# EAGLE board BigLatchingRelayOnAStick (EAGLE 7.4.0)
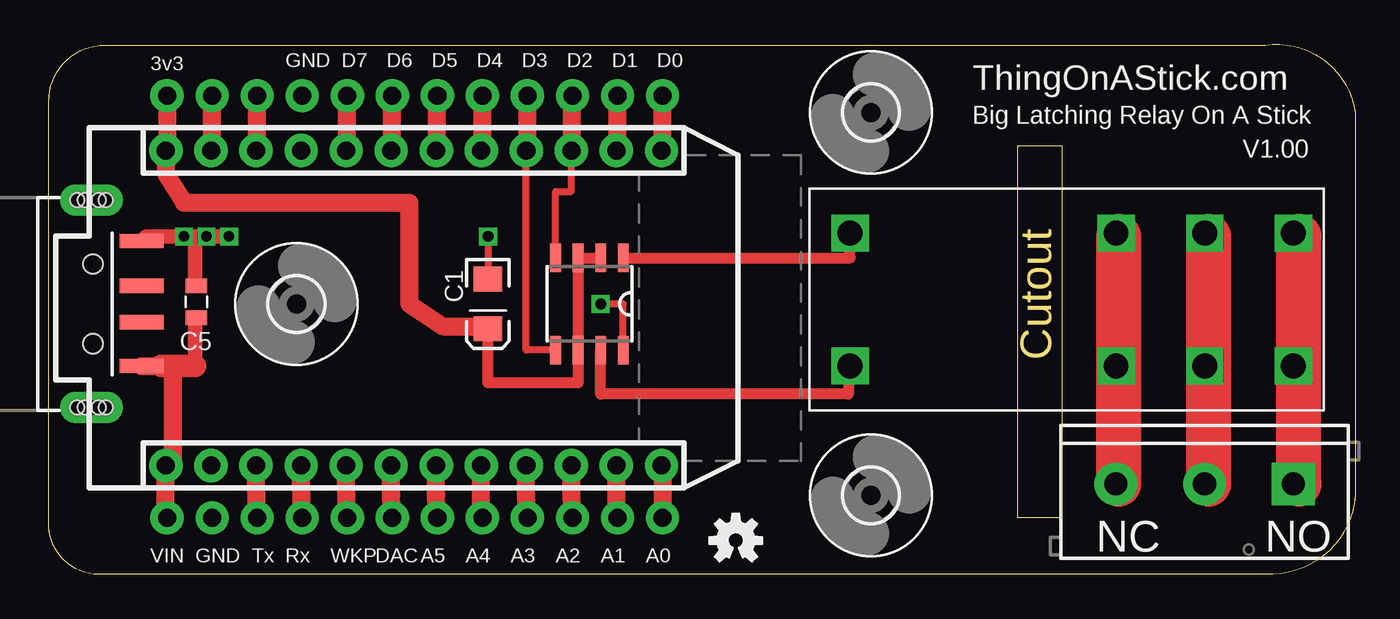
[diagram p0: board, top side]
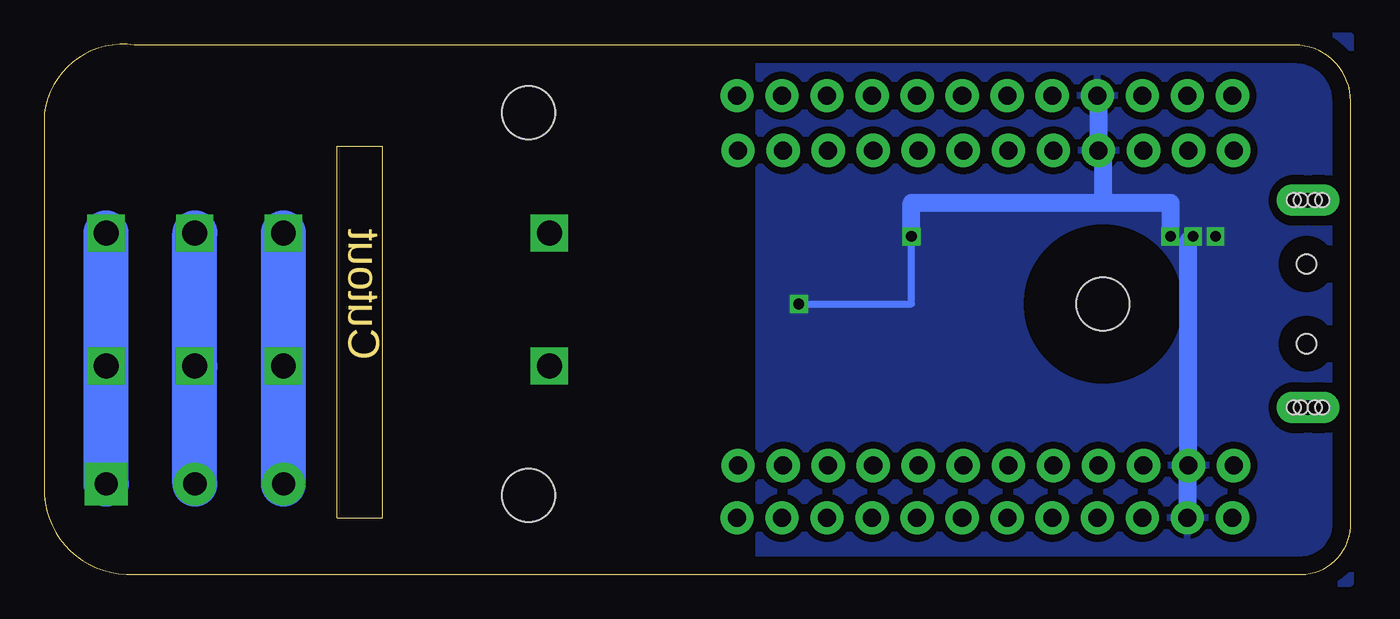
[diagram p1: board, bottom side, seen from below]

Size 73.68 x 29.89 mm. Coordinates in mm from the lower left corner, seen from the top.
Outline: 3.19,29.85 68.6,29.85 arc-90 73.68,26.04 73.68,4.45 arc-90 68.6,0.01 2.56,0.01 arc-90 0.02,3.18 0.02,26.68 arc-90 3.19,29.85
Outline: 54.63,24.14 54.63,3.18 57.17,3.18 57.17,24.14 54.63,24.14
Copper layers (1*16): Top 0.035mm / dielectric 1.5mm / Bottom 0.035mm
Design rules "default": minimum track width 10mil, minimum drill 24mil, track to track 8mil, track to pad 8mil, pad to pad 8mil, via to via 8mil, smd to smd 8mil, copper to edge 40mil, drill to drill 8mil, minimum pad ring 10mil, minimum via ring 8mil, stop-mask expansion 4mil, vias tented up to drill 0mil, thermal gap 10mil

## Footprints (pad centres in the part's own frame; a part is rotated, then mirrored left to right if it is on the bottom)
EIA3216 = smd 1.4 x 1.6: A 1.4,0; C -1.4,0
0805 = smd 0.8 x 1.2: 1 -0.9,0; 2 0.9,0
USB-A-SMT-MALE = smd 0.8 x 2.5: D+1 1.027,-5.87; D-1 -1.027,-5.87; GND1 3.551,-5.87; VBUS1 -3.5,-5.87 | drill 0.8 pad 1.778 long: P$1 5.85,-3.05; P$3 -5.85,-3.05 | hole 1.1: 2.25,-3.12; -2.25,-3.12 | hole 0.8: -5.85,-3.45; -5.85,-3.85; -5.85,-2.65; -5.85,-2.25; 5.85,-3.45; 5.85,-3.85; 5.85,-2.65; 5.85,-2.25
3,0 = hole 3: 0,0
PHOTON = drill 1.016 pad 1.88: 1 1.27,32.258; 2 1.27,29.718; 3 1.27,27.178; 4 1.27,24.638; 5 1.27,22.098; 6 1.27,19.558; 7 1.27,17.018; 8 1.27,14.478; 9 1.27,11.938; 10 1.27,9.398; 11 1.27,6.858; 12 1.27,4.318; 13 19.05,4.318; 14 19.05,6.858; 15 19.05,9.398; 16 19.05,11.938; 17 19.05,14.478; 18 19.05,17.018; 19 19.05,19.558; 20 19.05,22.098; 21 19.05,24.638; 22 19.05,27.178; 23 19.05,29.718; 24 19.05,32.258
SOP8 = smd 0.6 x 1.6: 1 -1.905,-2.6; 2 -0.635,-2.6; 3 0.635,-2.6; 4 1.905,-2.6; 5 1.905,2.6; 6 0.635,2.6; 7 -0.635,2.6; 8 -1.905,2.6
SCREWTERMINAL-5MM-3 = drill 1.3 pad 2.413 square: 1 0,0 | drill 1.3 pad 2.413: 2 5,0; 3 10,0
1X12_NO_SILK_KIT = drill 1.016 pad 1.88: 1 0,0; 2 2.54,0; 3 5.08,0; 4 7.62,0; 5 10.16,0; 6 12.7,0; 7 15.24,0; 8 17.78,0; 9 20.32,0; 10 22.86,0; 11 25.4,0; 12 27.94,0
G5RL-1E = drill 1.4 square: COIL+ -10.7,4; COIL- -10.7,-3.5; COM@1 9.3,4; COM@2 9.3,-3.5; NC@1 4.3,4; NC@2 4.3,-3.5; NO@1 14.3,4; NO@2 14.3,-3.5

## Placement (x,y rotation side)
C1  10uF  [EIA3216]  24.78,15.25 270 top
C5  1uF  [0805]  8.34,15.38 270 top
CONN1  USBA-SMD-MALE  [USB-A-SMT-MALE]  -0.62,15.25 90 top
H1  MOUNT-HOLE3.0  [3,0]  13.99,15.25 0 top
H2  MOUNT-HOLE3.0  [3,0]  46.37,26.04 0 top
H3  MOUNT-HOLE3.0  [3,0]  46.37,4.45 0 top
IC1  PHOTON  [PHOTON]  38.88,4.86 90 top
IC2  BD6211F  [SOP8]  30.5,15.25 180 top
JP1  [SCREWTERMINAL-5MM-3]  70.18,5.09 180 top
JP2  [1X12_NO_SILK_KIT]  34.62,3.18 180 top
JP3  [1X12_NO_SILK_KIT]  6.68,27 0 top
LOGO2  OSHW-LOGOS  [OSHW-LOGO-S]  38.75,1.91 0 top
U$1  RELAY_G5RL-1E  [G5RL-1E]  55.9,15.25 0 top

## Library data of the parts
C1 = SparkFun-Capacitors; PROD_ID: CAP-00811
C5 = SparkFun-Passives
CONN1 JP2 JP3 = SparkFun-Connectors
H1-H3 = holes
IC1 = Spark
IC2 = BD6211F
JP1 = SparkFun-Connectors; STOREFRONT_ID: PRT-08433
LOGO2 = SparkFun-Aesthetics
U$1 = RELAY_G5RL-1E

## Nets
3.3V: C1.A IC1.24 IC2.2 IC2.3 IC2.6 JP3.1
5V: C5.2 CONN1.VBUS1 IC1.1 JP2.12
A1: IC1.11 JP2.2
GND: C1.C C5.1 CONN1.GND1 IC1.2 IC1.21 IC2.8 JP2.11 JP3.4
N$1: JP1.2 U$1.COM@1 U$1.COM@2
N$3: JP1.1 U$1.NO@1 U$1.NO@2
N$4: JP1.3 U$1.NC@1 U$1.NC@2
N$7: IC1.23 JP3.2
N$11: IC1.22 JP3.3
N$12: IC2.1 U$1.COIL+
N$13: IC2.7 U$1.COIL-
N$15: IC1.18 JP3.7
N$16: IC1.17 JP3.8
N$20: IC1.14 JP3.11
N$21: IC1.13 JP3.12
N$22: IC1.3 JP2.10
N$23: IC1.4 JP2.9
N$24: IC1.5 JP2.8
N$25: IC1.6 JP2.7
N$26: IC1.7 JP2.6
N$28: IC1.9 JP2.4
N$29: IC1.10 JP2.3
N$31: IC1.12 JP2.1
N$33: IC1.20 JP3.5
N$35: IC1.19 JP3.6
RELAY1_FORWARD: IC1.15 IC2.4 JP3.10
RELAY1_REVERSE: IC1.16 IC2.5 JP3.9
RELAYSENSE: IC1.8 JP2.5

## Tracks (layer width: path | path; a pad name or v marks a point on that pad's centre or on a via)
3.3V
  Top 0.61: IC2.2 IC2.3 IC2.6 29.86,10.8 24.78,10.8 C1.A
  Top 1.016: JP3.1 6.68,23.97 IC1.24 6.62,22.61 7.64,20.96 20.34,20.96 20.34,15.25 22.24,13.98 24.65,13.98 C1.A
5V
  Top 0.813: JP2.12 6.62,3.25 | C5.2 8.27,14.41 8.27,11.75
  Top 1.016: CONN1.VBUS1 6.37,11.75 6.69,11.75 7,11.44 7,6.51 IC1.1 6.62,3.25
  Top 1.27: 8.27,11.75 6.37,11.75
A1
  Top 1.016: JP2.2 32.02,3.82 IC1.11
GND  (via drill 0.6)
  Top 0.406: IC2.8 32.4,15.25 v31.13,15.25 | v24.78,19.06 C1.C
  Top 0.813: v10.18,19.06 v8.91,19.06 8.27,19.06 | 8.27,19.06 v7.64,19.06 5.51,19.06 CONN1.GND1 | C5.1 8.27,16.34 8.27,19.06
  Bottom 0.406: v31.13,15.25 24.78,15.25 v24.78,19.06
  Bottom 1.016: JP2.11 9.23,6.07 IC1.2 9.16,18.8 v8.91,19.06 | JP3.4 14.24,27 IC1.21 13.99,23.91 13.99,20.96 | 13.99,20.96 10.18,20.96 v10.18,19.06 | v24.78,19.06 24.78,20.96 13.99,20.96
  pour Bottom (isolate 0.406): 0.02,30.36 33.42,30.36 33.42,-0.5 0.02,-0.5
N$1
  Bottom 2.54: JP1.2 U$1.COM@2 U$1.COM@1
N$3
  Bottom 2.54: JP1.1 U$1.NO@2 U$1.NO@1
N$4
  Bottom 2.54: JP1.3 U$1.NC@2 U$1.NC@1
N$7
  Top 1.016: IC1.23 9.23,23.91 JP3.2
N$11
  Top 1.016: IC1.22 11.77,23.91 JP3.3
N$12
  Top 0.61: IC2.1 45.2,17.85 U$1.COIL+
N$13
  Top 0.61: U$1.COIL- 45.1,11.75 45.1,10.17 31.13,10.17 IC2.7
N$15
  Top 1.016: IC1.18 21.93,23.91 JP3.7
N$16
  Top 1.016: IC1.17 24.47,23.91 JP3.8
N$19
  Top 2.54: 60.34,5.09 60.34,19.06
N$20
  Top 1.016: IC1.14 32.08,23.91 JP3.11
N$21
  Top 1.016: IC1.13 34.62,23.91 JP3.12
N$22
  Top 1.016: JP2.10 11.7,5.09 IC1.3
N$23
  Top 1.016: JP2.9 14.24,5.09 IC1.4
N$24
  Top 1.016: JP2.8 16.78,5.09 IC1.5
N$25
  Top 1.016: JP2.7 19.32,4.45 IC1.6
N$26
  Top 1.016: JP2.6 21.86,4.45 IC1.7
N$27
  Top 2.54: 65.42,5.09 65.42,19.06
N$28
  Top 1.016: JP2.4 26.94,4.45 IC1.9
N$29
  Top 1.016: JP2.3 29.48,4.45 IC1.10
N$30
  Top 2.54: 70.5,5.09 70.5,19.06
N$31
  Top 1.016: IC1.12 34.62,6.13 JP2.1
N$33
  Top 1.016: IC1.20 16.85,23.91 JP3.5
N$35
  Top 1.016: IC1.19 19.39,23.91 JP3.6
RELAY1_FORWARD
  Top 0.406: IC2.4 28.59,21.6 29.48,21.6 IC1.15
  Top 1.016: JP3.10 29.48,27 IC1.15
RELAY1_REVERSE
  Top 0.406: IC2.5 26.94,12.65 IC1.16
  Top 1.016: IC1.16 27,23.91 JP3.9
RELAYSENSE
  Top 1.016: JP2.5 24.4,3.25 IC1.8
  Bottom 0.406: IC1.8 24.78,6.51

## Text on the board
Dimension: Cutout
tNames: 3v3 | GND | D7 | D6 | D5 | D4 | D3 | D2 | D1 | D0 | ThingOnAStick.com | Big Latching Relay On A Stick | V1.00 | NC | NO | VIN | GND | Tx | Rx | WKP | DAC | A5 | A4 | A3 | A2 | A1 | A0